# EAGLE board programmer (EAGLE 6.4)
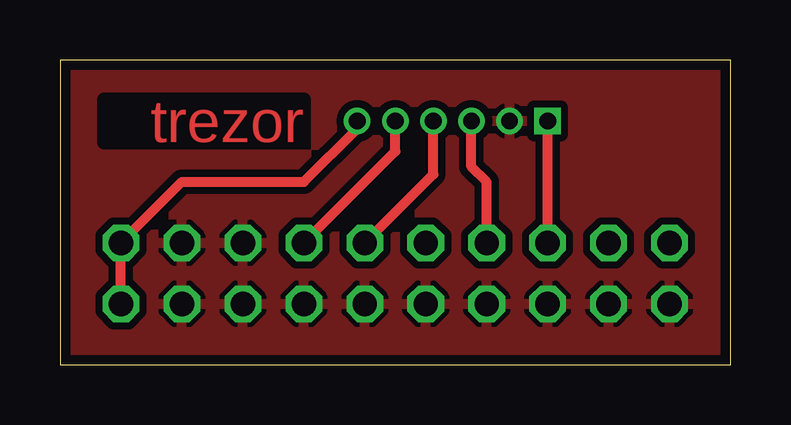
[diagram p0: board, top side]
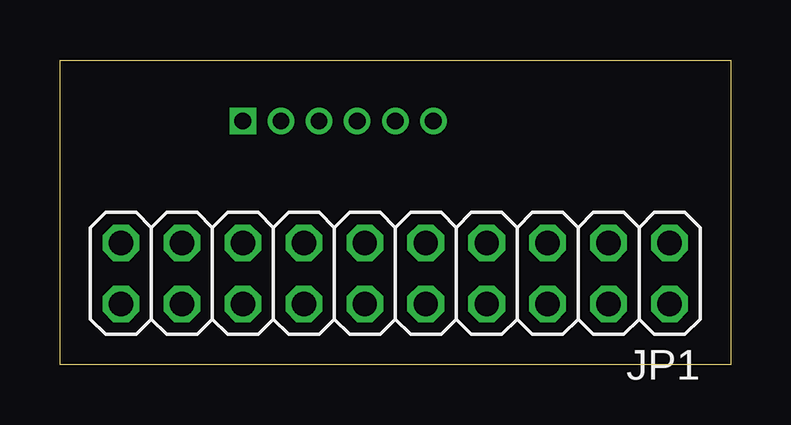
[diagram p1: board, bottom side, seen from below]

Size 27.94 x 12.7 mm. Coordinates in mm from the lower left corner, seen from the top.
Outline: 0,0 27.94,0 27.94,12.7 0,12.7 0,0
Copper layers (1*16): Top 0.035mm / dielectric 1.5mm / Bottom 0.035mm
Design rules "default *": minimum track width 8mil, minimum drill 16mil, track to track 12mil, track to pad 12mil, pad to pad 12mil, via to via 12mil, smd to smd 12mil, copper to edge 16mil, drill to drill 8mil, minimum pad ring 8mil, minimum via ring 8mil, stop-mask expansion 4mil, vias tented up to drill 0mil, thermal gap 8mil

## Footprints (pad centres in the part's own frame; a part is rotated, then mirrored left to right if it is on the bottom)
2X10 = drill 1.016 octagon: 1 -11.43,-1.27; 2 -11.43,1.27; 3 -8.89,-1.27; 4 -8.89,1.27; 5 -6.35,-1.27; 6 -6.35,1.27; 7 -3.81,-1.27; 8 -3.81,1.27; 9 -1.27,-1.27; 10 -1.27,1.27; 11 1.27,-1.27; 12 1.27,1.27; 13 3.81,-1.27; 14 3.81,1.27; 15 6.35,-1.27; 16 6.35,1.27; 17 8.89,-1.27; 18 8.89,1.27; 19 11.43,-1.27; 20 11.43,1.27
SWD = drill 0.7 square: 1 0,0 | drill 0.7: 2 1.587,0; 3 3.175,0; 4 4.763,0; 5 6.35,0; 6 7.938,0

## Placement (x,y rotation side)
JP1  [2X10]  13.97,3.81 180 bottom
U$1  SWD  [SWD]  20.32,10.16 180 top

## Library data of the parts
JP1 = pinhead
U$1 = fabhack

## Nets
GND: JP1.3 JP1.4 JP1.5 JP1.6 JP1.8 JP1.10 JP1.12 JP1.14 JP1.16 JP1.18 JP1.20 U$1.2
N$1: JP1.7 U$1.5
N$2: JP1.9 U$1.4
N$3: JP1.13 U$1.3
N$4: JP1.15 U$1.1
VCC: JP1.1 JP1.2 U$1.6

## Tracks (layer width: path | path; a pad name or v marks a point on that pad's centre or on a via)
GND
  pour Top: 0,0 27.94,0 27.94,12.7 0,12.7
N$1
  Top 0.406: JP1.7 13.97,8.89 U$1.5
N$2
  Top 0.406: JP1.9 15.56,7.94 U$1.4
N$3
  Top 0.406: JP1.13 17.78,7.62 17.14,8.26 U$1.3
N$4
  Top 0.406: JP1.15 U$1.1
VCC
  Top 0.406: JP1.2 JP1.1 5.08,7.62 10.16,7.62 12.38,9.84 U$1.6

## Text on the board
Top: trezor